# Allegro board RS485_V10B.brd
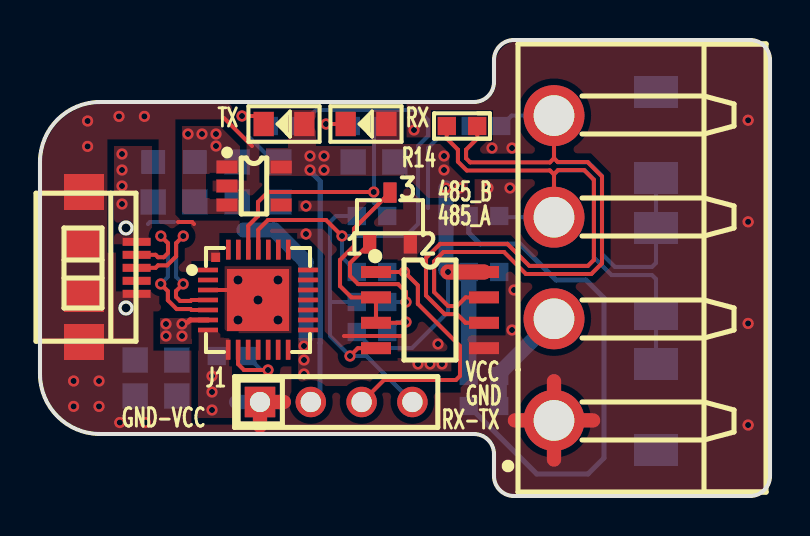
[diagram p0: board, top side]
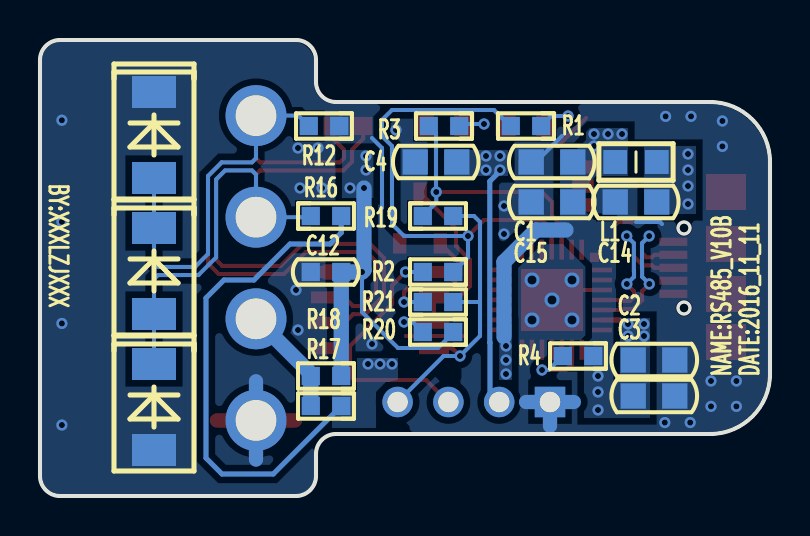
[diagram p1: board, bottom side, seen from below]

Outline 36.5 x 22.8 mm; copper layers: TOP, BOTTOM. Coordinates in mm from the lower left corner of the outline.
Outline path: 0,16.7 arc(0.88,18.82) 3,19.7 21.7,19.7 arc(22.41,19.99) 22.7,20.7 22.7,21.8 arc(22.99,22.51) 23.7,22.8 35.5,22.8 arc(36.21,22.51) 36.5,21.8 36.5,1 arc(36.21,0.29) 35.5,0 23.7,0 arc(22.99,0.29) 22.7,1 22.7,2.1 arc(22.41,2.81) 21.7,3.1 3,3.1 arc(0.88,3.98) 0,6.1 0,16.7

## Design rules (mm)
net group DP1: nets USB_DN USB_DP
net group DP2: nets 485_A 485_B

## Placement (name value [footprint] x y rotation side)
C1  10uF_25V  [CC0805]  10.9 16.7 0 bottom
C2  10uF_25V  [CC0805]  5.8 6.8 180 bottom
C3  10uF_25V  [CC0805]  5.8 5 180 bottom
C4  10uF_25V  [CC0805]  16.7 16.7 0 bottom
C12  0.1uF_50V  [CC0603]  22.2 11.2 0 bottom
C14  10uF_25V  [CC0805]  6.7 14.7 0 bottom
C15  10uF_25V  [CC0805]  10.9 14.7 0 bottom
D1  LED_GREEN_RX  [LED0805]  12.2 18.6 180 top
D2  LED_RED_TX  [LED0805]  16.3 18.6 180 top
D4  P6SMB8.2CA-E3/52  [DO-214AA]  30.8 4.4 270 bottom
D5  P6SMB8.2CA-E3/52  [DO-214AA]  30.8 11.2 270 bottom
D6  P6SMB8.2CA-E3/52  [DO-214AA]  30.8 18 270 bottom
J1  -  [HEADER4X1_2R54]  11 4.7 0 top
J6  WJ2EDGRC-5.08-4P  [WJ2EDGRC-5R08-4P]  25.7 11.4 90 top
L1  BEAD_BLM21PG600  [LC0805]  6.7 16.7 0 bottom
NOREF  -  []  0 6.4 0 top
NOREF#2  -  []  24.3 0 90 top
Q3  S8050_NPN  [SOT23_123]  17.5 13.9 0 top
R1  1K  [RC0603]  12.2 18.5 180 bottom
R2  20R  [RC0603]  16.6 11.2 180 bottom
R3  1K  [RC0603]  16.3 18.5 180 bottom
R4  10K  [RC0603]  9.6 7 180 bottom
R12  4.7K  [RC0603]  22.3 18.5 180 bottom
R14  120R/NI  [RC0603]  21.1 18.5 0 top
R16  4.7K  [RC0603]  22.2 14 0 bottom
R17  0R/NI  [RC0603]  22.2 4.5 180 bottom
R18  0R  [RC0603]  22.2 6 180 bottom
R19  20R  [RC0603]  16.6 14 0 bottom
R20  1M  [RC0603]  16.6 8.2 180 bottom
R21  100K  [RC0603]  16.6 9.7 0 bottom
U1  CP2102  [QFN-28]  8.4 11.3 0 top
U2  SPX3819M5-L-3-3/TR  [SOT23-5]  10.7 15.5 270 top
U6  MAX3485ESA  [SOIC8]  19.5 9.3 270 top
USB1  USB-MICRO_USB232  [USB-MICRO]  4.9 11.4 270 top

## Library data of the parts
C1-C4 C12 = CAP NP_2
C14 C15 = CAP NP_0
D1 D2 = LED_4
D4 D5 = P6SMB_1
D6 = P6SMB_2
J1 = CONN RCPT 4
J6 = WJ2EDGRC-5.08-4P
L1 = IND_BEAD_0805_600OHM_200MA
Q3 = L14G1/TO_1
R1-R4 R12 R14 R16-R21 = R_Generic
U1 = CP2102
U2 = SPX3819M5-L-1-2
U6 = MAX3485ESA
USB1 = USB-MICRO

## Footprints (pads in the part's own frame, mm; a bottom-side part is the same pattern mirrored in y, then rotated)
CC0603
  rect 0.914x0.914 smd: 1(-0.762,0) 2(0.762,0)
CC0805
  rect 1.27x1.27 smd: 1(-1.041,0) 2(1.041,0)
DO-214AA
  rect 1.6x2.2 smd: 1(2.1,0) 2(-2.2,0)
HEADER4X1_2R54
  rect 1.524x1.524 hole 1.016: 1(0,0)
  round 1.524 hole 1.016: 2(2.54,0) 3(5.08,0) 4(7.62,0)
LC0805
  rect 1.194x1.194 smd: 1(-1.041,0) 2(1.041,0)
LED0805
  rect 1.016x1.219 smd: 1(-1.016,0) 2(1.016,0)
QFN-28
  rect 1x0.23 smd: 1(0,0) 2(0,-0.5) 3(0,-1) 4(0,-1.5) 5(0,-2) 6(0,-2.5) 7(0,-3) 15(5.003,-2.998) 16(5.003,-2.498) 17(5.003,-1.998) 18(5.003,-1.498) 19(5.003,-0.998) 20(5.003,-0.498) 21(5.003,0.002)
  rect 0.23x1 smd: 8(1.006,-3.987) 9(1.506,-3.987) 10(2.006,-3.987) 11(2.506,-3.987) 12(3.006,-3.987) 13(3.506,-3.987) 14(4.006,-3.987) 22(4.014,1.016) 23(3.514,1.016) 24(3.014,1.016) 25(2.514,1.016) 26(2.014,1.016) 27(1.514,1.016) 28(1.014,1.016)
  rect 0.45x0.47 smd: 29(0.381,0.635)
  rect 3.1x3.1 smd: 30(2.5,-1.5)
RC0603
  rect 0.914x0.914 smd: 1(-0.762,0) 2(0.762,0)
SOIC8
  rect 0.6x1.5 smd: 1(-1.9,-2.7) 2(-0.63,-2.7) 3(0.64,-2.7) 4(1.91,-2.7) 5(1.91,2.7) 6(0.64,2.7) 7(-0.63,2.7) 8(-1.9,2.7)
SOT23-5
  rect 0.65x1.06 smd: 1(-0.95,-1.354) 2(0,-1.354) 3(0.95,-1.354) 4(0.95,1.354) 5(-0.95,1.354)
SOT23_123
  rect 0.66x1.016 smd: 1(-1.016,-1.27) 2(1.016,-1.27) 3(0,1.27)
USB-MICRO
  rect 0.4x1.4 smd: 1(-1.31,-0.07) 2(-0.66,-0.07) 3(-0.01,-0.07) 4(0.64,-0.07) 5(1.29,-0.07)
  rect 1.8x2 smd: 6(-3.8,-2.7) 7(-1.2,-2.7) 8(1.3,-2.7) 9(3.7,-2.7)
WJ2EDGRC-5R08-4P
  round 3.048 hole 2.032: 1(-7.62,0) 2(-2.54,0) 3(2.54,0) 4(7.62,0)

## Nets
GND: C1.2 C2.2 C3.2 C4.2 C12.2 C14.2 C15.2 D4.1 D6.2 J1.1 J6.1 Q3.2(E) R12.2 U1.3(GND_1) U1.29(GND_2) U1.30(GND_3) U2.2(GND) U6.5(GND) USB1.5(GND) USB1.6(P_2) USB1.7(P_1) USB1.8(P_3) USB1.9(P_4)
VCC_3.3V: C4.1 C12.1 D1.1(ANODE) D2.1(ANODE) J1.2 R18.2 R20.2 U2.5(VOUT) U6.8(VCC)
VCC_VUSB: C1.1 C3.1 C15.1 L1.2(B) R4.2 R16.1 R17.2 U1.7(REGIN) U1.8(VBUS) U2.1(VIN) U2.3(EN)
485_A: D4.2 D5.1 J6.3 R14.1 R16.2 U6.6(A)
485_B: D5.2 D6.1 J6.4 R12.1 R14.2 U6.7(B)
RXD: J1.3 R2.1 U6.1(RO)
TXD: J1.4 R19.1 R21.1 U6.4(DI)
USB_DN: U1.5(D-) USB1.2(D-)
USB_DP: U1.4(D+) USB1.3(D+)
N11637762: C14.1 L1.1(A) USB1.1(VBUS)
N11638713: C2.1 U1.6(VDD)
N11638764: R4.1 U1.9(R\S\T\)
N11638791: D1.2(CATHODE) R1.2
N11639184: R3.1 R19.2 U1.26(TXD)
N11639199: R1.1 R2.2 U1.25(RXD)
N11774127: D2.2(CATHODE) R3.2
N16632876: J6.2 R17.1 R18.1
N16704646: Q3.3(C) R20.1 U6.2(R\E\) U6.3(DE)
N16704658: Q3.1(B) R21.2

Pads without a net: U1 1 2 10 11 12 13 14 15 16 17 18 19 20 21 22 23 24 27 28; U2 4; USB1 4

## Via types
v1: diameter 0.559, hole 0.305, TOP to BOTTOM, 67 vias
v2: diameter 0.762, hole 0.457, TOP to BOTTOM, 5 vias

## Routing (per net, layer and track width the routed paths; a pad name or vN(x,y) marks a point on that pad's centre or on a via; arc(x,y) is an arc through that point)
GND: length 33.4
  TOP w0.203: U1.3 10.4,10.3 v2(10.9,9.8) ; 6.9,13.7 7.6,13.7 7.7,13.6 ; 15.2,8 18.2,8 ; 9.2,18.9 10.6,17.5 ; U1.29 8.78,11.92
  TOP w0.711: 25.7,1.82 J6.1 ; J6.1 23.74,3.78 ; J6.1 27.66,3.78 ; J6.1 25.7,5.74 ; 11,3.51 J1.1 12.19,4.7
  BOTTOM w0.203: 5.4,13.6 5.5,13.7 6.7,13.7 ; 19.4,14.4 19.4,17.4 19.9,17.9 ; 10.4,18 11.7,16.7 C1.2
  BOTTOM w0.711: 11,3.51 J1.1 ; J1.1 9.81,4.7 ; J1.1 12.19,4.7 ; 25.7,5.74 J6.1 25.7,1.82
  vias: v1(1.68,5.75) v1(1.68,4.48) v1(2.38,18.75) v1(2.38,17.48) v1(2.95,5.75) v1(2.95,4.48) v1(3.95,18.98) v1(3.99,3.67) v1(5.22,18.98) v1(5.26,3.67) v1(13.3,14.5) v1(13.3,13.1) v1(18.7,18.3) v1(19.9,7.6) v1(22.4,15.4) v1(22.6,17.4) v1(23.5,15.4) v1(23.6,17.4) v1(23.6,8.3) v1(23.7,10.3) v1(35.41,18.79) v1(35.41,13.71) v1(35.41,8.63) v1(35.41,3.55) v2(9.9,10.8) v2(9.9,8.8) v2(11.9,10.8) v2(11.9,8.8)
VCC_3.3V: length 31.9
  TOP w0.762: v1(20.4,11.2) U6.8
  BOTTOM w0.203: R20.2 15.84,8.16 16.6,7.4 18.6,7.4 20.4,9.2 v1(20.4,11.2)
  BOTTOM w0.254: J1.2 14,5.16 14,7.65 14.01,7.67 14.01,15.73 13.67,16.08 13.67,16.13 v1(13.5,16.3)
  BOTTOM w0.762: R18.2 C12.1 v1(20.4,11.2) 20.3,11.3 v1(20.3,15.4)
  vias: v1(13.5,17) v1(14.2,17) v1(14.2,16.3) v1(20.2,17) v1(20.2,16.3) v1(21,15.4)
VCC_VUSB: length 33
  BOTTOM w0.254: R16.1 21.44,13.16 22,12.6 24,12.6 25.8,10.8 27.3,10.8 28.2,9.9 28.2,1.9 27.4,1.1 24.84,1.1 R17.2
  BOTTOM w0.762: 10.2,13.3 11.7,13.3 13.3,11.7 13.3,7.96
  vias: v1(7.4,18.1) v1(8.1,18.1) v1(8.6,6) v1(8.6,5.2) v1(8.6,4.3) v1(8.8,18.1) v1(8.8,17.5) v1(13.2,7.5) v1(13.2,6.8) v1(13.2,6.1) v1(18.9,6.6) v1(19.5,6.6) v1(20.1,6.6)
485_A: length 49
  TOP w0.203: 25.7,16.07 25.5,16.28 21.34,16.28 20.9,16.72 20.9,17.31 20.34,17.87 R14.1 ; 25.7,16.07 25.7,16.09 25.9,16.29 27.21,16.29 27.69,15.81 27.69,11.8 27.4,11.51 24.47,11.51 23.37,12.61 20.01,12.61 19.3,11.9 19.3,10.03 20.23,9.09 20.85,9.09 21.28,8.66 U6.6 ; 25.7,16.07 J6.3
  BOTTOM w0.203: D4.2 D5.1 30.8,10.84 30.6,11.05 28.58,11.05 27.69,11.93 27.69,15.83 27.25,16.28 25.9,16.28 25.7,16.07 J6.3 23.02,13.94 R16.2
485_B: length 48.4
  TOP w0.203: U6.7 21.28,9.93 20.85,9.5 20.4,9.5 19.71,10.2 19.71,11.73 20.17,12.2 23.2,12.2 24.3,11.1 27.57,11.1 28.1,11.63 28.1,15.97 27.37,16.7 25.89,16.7 25.7,16.89 ; 25.7,16.89 J6.4 ; 25.7,16.89 25.5,16.68 21.51,16.68 21.3,16.89 21.3,17.31 21.86,17.87 R14.2
  BOTTOM w0.203: D6.1 D5.2 30.8,11.66 30.6,11.45 28.75,11.45 28.1,12.1 28.1,16 27.42,16.68 25.9,16.68 25.7,16.89 J6.4 23.58,19.02 R12.1
RXD: length 14.1
  TOP w0.203: U6.1 v1(18.23,11.2) 18.89,10.53 18.89,9.61 21,7.5 21,6 20.8,5.8 17.2,5.8 16.1,4.7 J1.3
  BOTTOM w0.203: R2.1 v1(18.23,11.2)
TXD: length 15.4
  TOP w0.203: U6.4 15.89,7.39 v1(15.5,7)
  BOTTOM w0.203: R21.1 14.5,9.7 ; 14.5,9.7 14.5,8 v1(15.5,7) 16.32,7 J1.4 ; 14.5,9.7 14.5,13.7 14.8,14 R19.1
USB_DN: length 8.6
  TOP w0.203: v1(6.04,13) 6.4,12.64 6.4,12.15 6.19,11.94 5.9,11.94 5.78,12.06 USB1.2 ; U1.5 7.57,9.3 7.53,9.35 6.83,9.35 6.39,9.79 6.39,10.24 v1(6.04,10.6)
  BOTTOM w0.203: v1(6.04,13) 6.4,12.64 6.4,11.42 6.39,11.41 6.39,10.96 v1(6.04,10.6)
USB_DP: length 8.6
  TOP w0.203: USB1.3 5.78,11.41 5.9,11.53 6.36,11.53 6.81,11.98 6.81,12.64 v1(7.16,13) ; U1.4 7.57,9.8 7.53,9.75 7,9.75 6.8,9.96 6.8,10.24 v1(7.16,10.6)
  BOTTOM w0.203: v1(7.16,10.6) 6.8,10.96 6.8,11.25 6.81,11.25 6.81,12.64 v1(7.16,13)
N11637762:
  vias: v1(4.1,17.1) v1(4.1,16.3) v1(4.1,15.5) v1(4.1,14.6)
N11638713: length 1
  TOP w0.254: U1.6 7.5,8.8 7.4,8.7
  vias: v1(6.3,8.6) v1(6.3,8) v1(7.1,8.6) v1(7.1,8)
N11638764: length 3.7
  TOP w0.203: v1(11.4,6.3) 10.2,6.3 9.91,6.59 9.91,7.31
  BOTTOM w0.203: R4.1 11.06,6.3 v1(11.4,6.3)
N11638791: length 2.9
  TOP w0.203: v1(10.1,19) 10.9,19 11.18,18.72 D1.2
  BOTTOM w0.203: v1(10.1,19) 10.94,19 R1.2
N11639184: length 13.5
  TOP w0.203: v1(16.69,15.2) 11.4,15.2 10.9,14.7 10.9,14 10.41,13.51 U1.26
  BOTTOM w0.203: R3.1 16.7,18.14 16.7,15.21 v1(16.69,15.2) 16.69,14.67 R19.2
N11639199: length 24.3
  TOP w0.203: U1.25 10.91,13.31 11.4,13.8 14.3,13.8 v1(15.1,13)
  BOTTOM w0.203: R2.2 15.1,11.94 v1(15.1,13) 18.3,13 18.9,13.6 18.9,17.5 19.4,18 19.4,18.8 18.9,19.3 13.8,19.3 13,18.5 R1.1
N11774127: length 2.3
  TOP w0.203: D2.2 v1(14.3,18.6)
  BOTTOM w0.203: v1(14.3,18.6) 15.44,18.6 R3.2
N16632876: length 5.5
  BOTTOM w0.762: J6.2 22.96,6.12 R18.1 R17.1
N16704646: length 11.7
  TOP w0.203: Q3.3 15.7,13.37 15.7,12.5 15,11.8 15,10.5 15.57,9.93 U6.2 U6.3 18.26,8.66 v1(18.3,8.7)
  BOTTOM w0.203: R20.1 17.86,8.7 v1(18.3,8.7)
N16704658: length 6.6
  TOP w0.203: Q3.1 15.5,11.65 15.5,11 15.9,10.6 15.92,10.6 15.92,10.6 17.9,10.6 18.3,10.2 v1(18.3,9.7)
  BOTTOM w0.203: R21.2 v1(18.3,9.7)

## Copper pours and planes (outline as drawn; the poured copper is in the pictures)
GND on TOP: 0.1,16.7 0.97,18.73 3,19.6 21.7,19.6 22.49,19.91 22.8,20.7 22.8,21.8 23.1,22.4 23.7,22.7 35.5,22.7 36.13,22.43 36.4,21.8 36.4,1 36.13,0.37 35.5,0.1 23.7,0.1 23.05,0.35 22.8,1 22.8,2.1 22.49,2.89 21.7,3.2 3,3.2 0.96,4.06 0.1,6.1 ; 1 cut-out
GND on BOTTOM: 0.1,16.7 0.97,18.73 3,19.6 21.7,19.6 22.49,19.91 22.8,20.7 22.8,21.8 23.1,22.4 23.7,22.7 35.5,22.7 36.13,22.43 36.4,21.8 36.4,1 36.13,0.37 35.5,0.1 23.7,0.1 23.05,0.35 22.8,1 22.8,2.1 22.49,2.89 21.7,3.2 3,3.2 0.96,4.06 0.1,6.1 ; 7 cut-outs
VCC_3.3V on TOP: 19.4,14.9 18.2,16.1 18.2,16 11.3,16 11.3,17.4 12.4,17.4 12.4,19.3 13.8,19.3 13.8,17.5 16.6,17.5 16.6,19.3 18,19.3 18,17.6 20.1,17.6 20.5,17.2 20.5,16.6 21.4,15.7 21.4,14.9
VCC_3.3V on BOTTOM: 16.3,17.3 16.3,16 13.1,16 13.1,17.3
VCC_3.3V on BOTTOM: 19.7,17.3 21.4,17.3 21.4,14.9 19.7,14.9
VCC_VUSB on TOP: 10,14.9 8.3,14.9 8.3,16.1 10,16.1 10,17.5 9,18.5 7.1,18.5 7.1,14.2 7.2,14.1 10,14.1
VCC_VUSB on TOP: 7.9,8.4 7.9,3.9 9.6,3.9 9.6,7.9 9.2,7.9 8.9,8.2 8.9,8.4
VCC_VUSB on TOP: 12.9,7.9 14.1,7.9 15.1,6.9 20.7,6.9 20.7,5.5 12.9,5.5
VCC_VUSB on BOTTOM: 6,3.9 6,5.7 7.7,5.7 7.7,13.6 7.9,13.8 8.8,13.8 9.2,14.2 9.2,15.5 8.7,16 7.1,16 7.1,18.4 9,18.4 9.2,18.2 9.2,17.8 9.7,17.3 10.5,17.3 10.5,13.2 8.9,11.6 8.9,7.9 9.3,7.5 9.3,3.9
VCC_VUSB on BOTTOM: 12.9,8.6 12.9,5.8 13.7,5.8 13.7,8.6
VCC_VUSB on BOTTOM: 21.9,3.4 21.9,5.1 20.9,5.1 20.9,6.9 18.6,6.9 18.6,5.7 19.2,5.7 19.7,5.2 19.7,3.4
N11637762 on TOP: 5.6,12.5 5.6,17.5 3.7,17.5 3.7,12.5
N11637762 on BOTTOM: 3.7,17.5 3.7,14.1 6.3,14.1 6.3,17.5
N11638713 on TOP: 8.9,8.9 6,8.9 6,7.6 7.6,7.6 7.6,8.4 7.9,8.7 8.9,8.7
N11638713 on BOTTOM: 7.5,8.9 6,8.9 6,6.1 7.5,6.1

## Text on the board
Ref Des/Silkscreen Bottom: BY:XXXLZJXXX | DATE:2016_11_11 | NAME:RS485_V10B
Ref Des/Silkscreen Top: GND-VCC | TX | RX | 485_B | 485_A | RX-TX | VCC | GND
DEVICE_TYPE_TOP: FIGURE | SIZE | 0.3048 | 0.4572 | 1.016 | 2.032 | DRILL CHART: TOP to BOTTOM | ALL UNITS ARE IN MILLIMETERS | PLATED | QTY | 67 | 5 | 4
